# EAGLE board Power_Demo_R2 (EAGLE 5.10)
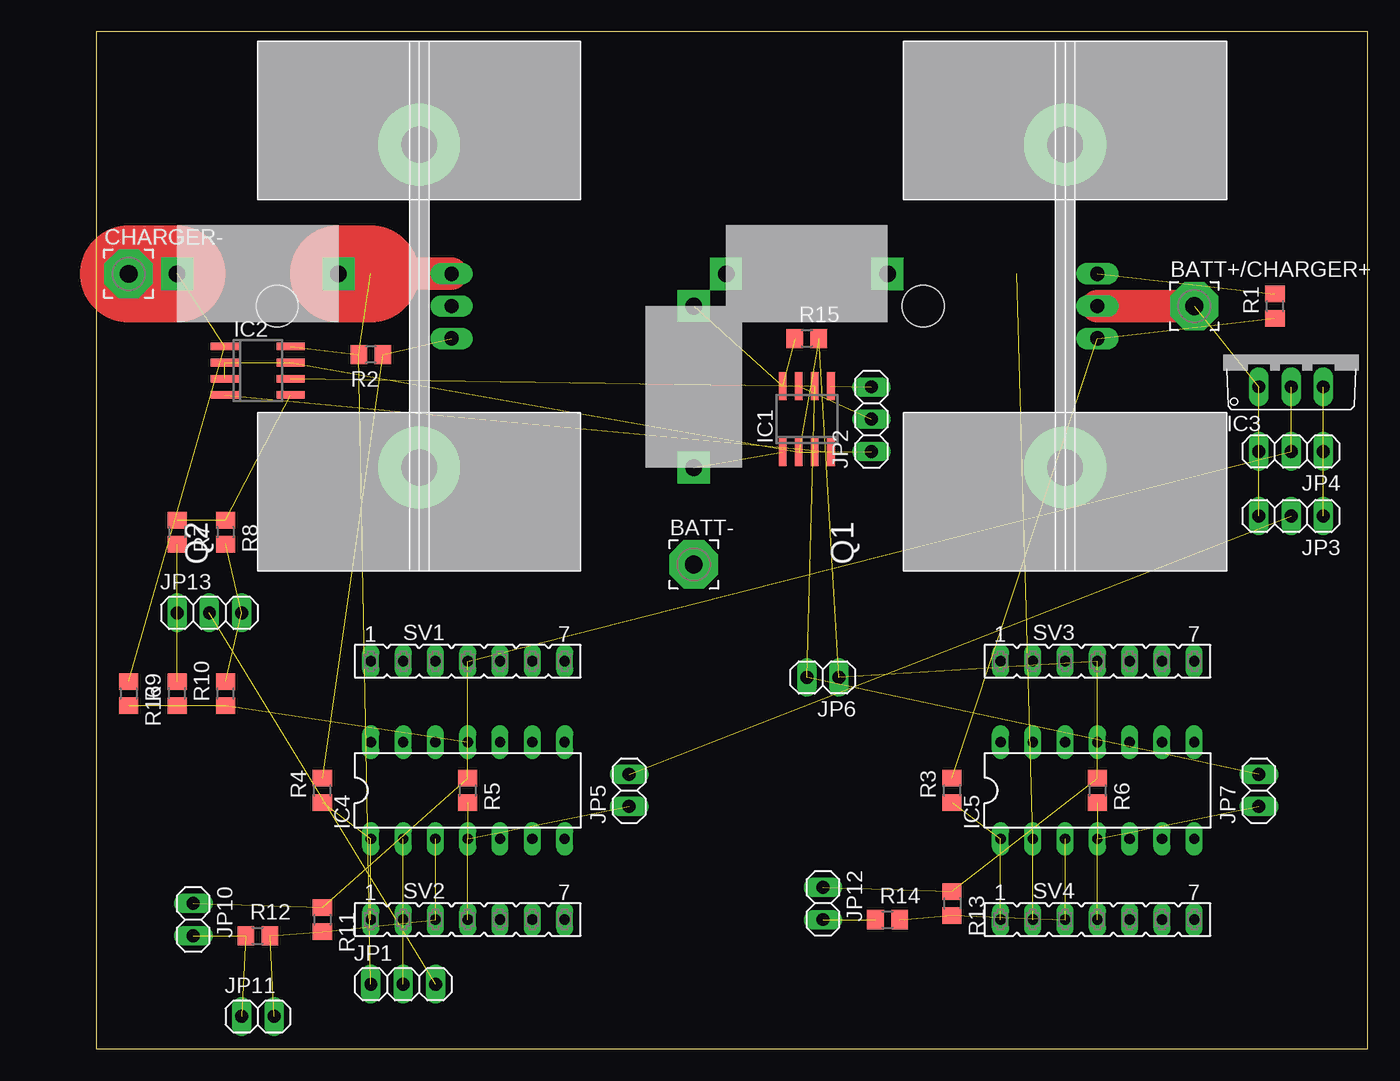
[diagram p0: board, top side]
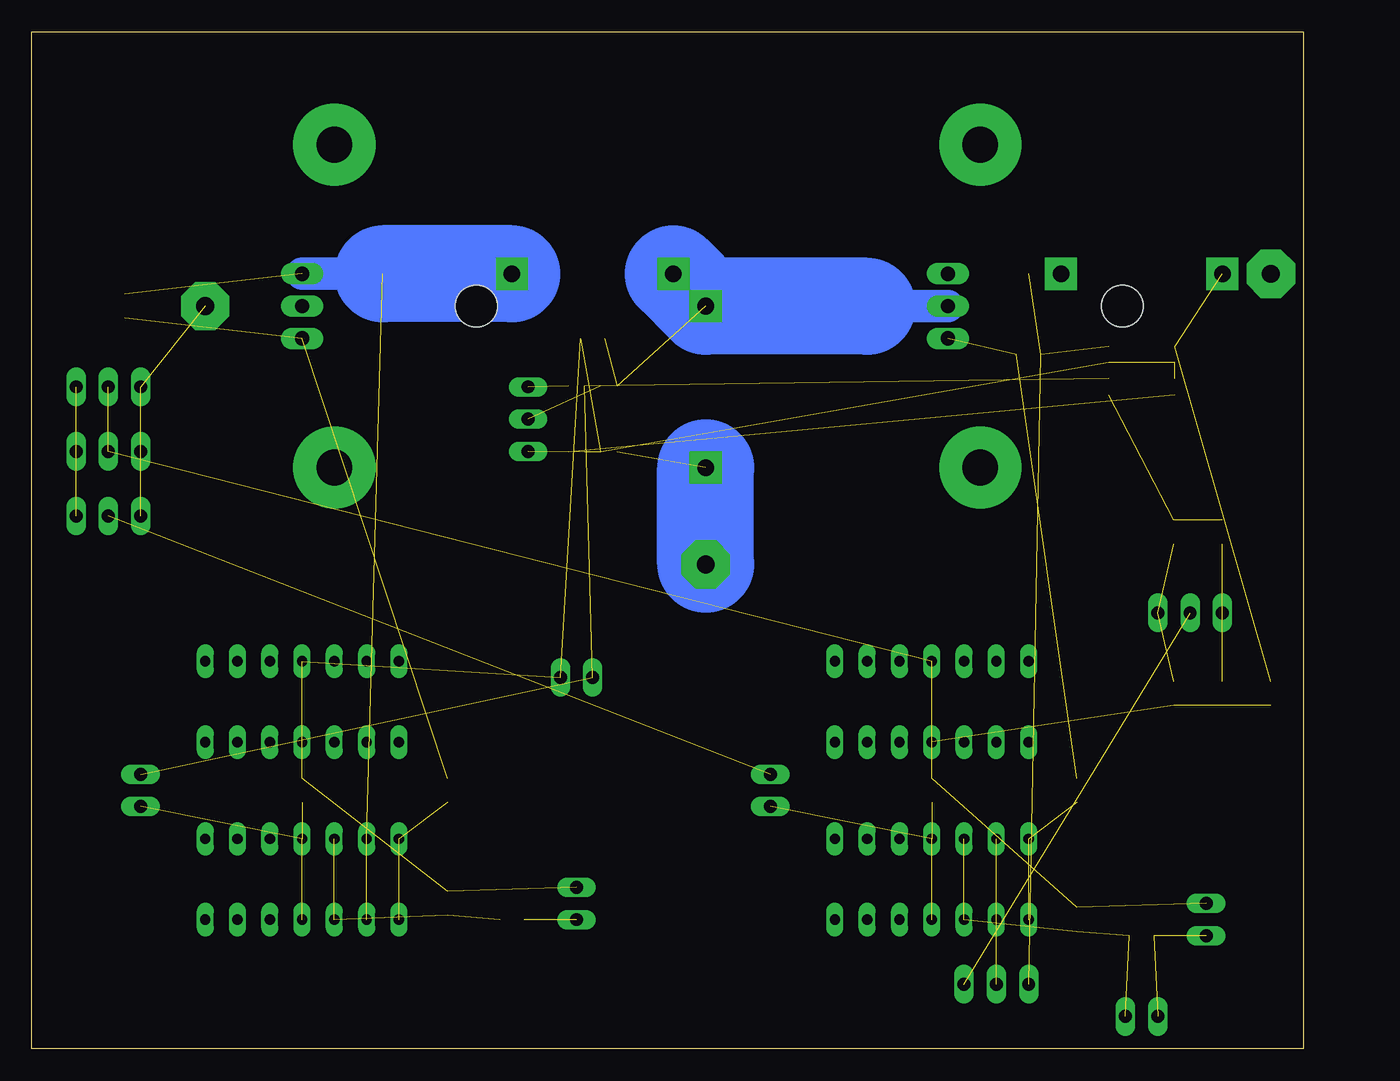
[diagram p1: board, bottom side, seen from below]

Size 100 x 80 mm. Coordinates in mm from the lower left corner, seen from the top.
Outline: 0,0 100,0 100,80 0,80 0,0
Copper layers (1*16): Top 0.035mm / dielectric 1.5mm / Bottom 0.035mm
Design rules "default": minimum track width 10mil, minimum drill 24mil, track to track 8mil, track to pad 8mil, pad to pad 8mil, via to via 8mil, smd to smd 8mil, copper to edge 40mil, drill to drill 8mil, minimum pad ring 10mil, minimum via ring 8mil, stop-mask expansion 4mil, vias tented up to drill 0mil, thermal gap 10mil

## Footprints (pad centres in the part's own frame; a part is rotated, then mirrored left to right if it is on the bottom)
3,81/1,4 = drill 1.397 pad 3.81 octagon: 1 0,0
SO08 = smd 0.6 x 2.2: 1 -1.905,-2.6; 2 -0.635,-2.6; 3 0.635,-2.6; 4 1.905,-2.6; 5 1.905,2.6; 6 0.635,2.6; 7 -0.635,2.6; 8 -1.905,2.6
TO220V = drill 1.016 long: 1 -2.54,-2.54; 2 0,-2.54; 3 2.54,-2.54
DIL14 = drill 0.813 long: 1 -7.62,-3.81; 2 -5.08,-3.81; 3 -2.54,-3.81; 4 0,-3.81; 5 2.54,-3.81; 6 5.08,-3.81; 7 7.62,-3.81; 8 7.62,3.81; 9 5.08,3.81; 10 2.54,3.81; 11 0,3.81; 12 -2.54,3.81; 13 -5.08,3.81; 14 -7.62,3.81
1X03 = drill 1.016 long: 1 -2.54,0; 2 0,0; 3 2.54,0
1X02 = drill 1.016 long: 1 -1.27,0; 2 1.27,0
TO220-W/657-20ABP = drill 1.118 long: 1 -2.54,-2.54; 2 0,-2.54; 3 2.54,-2.54 | drill 2.8 pad 6.452 round: P$1 -12.7,0; P$2 12.7,0 | hole 3.302: 0,11.176
R0805 = smd 1.3 x 1.5: 1 -0.95,0; 2 0.95,0
FE07 = drill 0.813 long: 1 -7.62,0; 2 -5.08,0; 3 -2.54,0; 4 0,0; 5 2.54,0; 6 5.08,0; 7 7.62,0
630HR050E = drill 1.3 pad 2.54 square: P$1 -6.35,0; P$2 6.35,0

## Placement (x,y rotation side)
BATT+/CHARGER+  [3,81/1,4]  86.36,58.42 0 top
BATT-  [3,81/1,4]  46.99,38.1 0 top
CHARGER-  [3,81/1,4]  2.54,60.96 0 top
IC1  AD8210D  [SO08]  55.88,49.53 0 top
IC2  AD8210D  [SO08]  12.7,53.34 270 top
IC3  7805TV  [TO220V]  93.98,54.61 0 top
IC4  MC33079P  [DIL14]  29.21,20.32 0 top
IC5  MC33079P  [DIL14]  78.74,20.32 0 top
JP1  [1X03]  24.13,5.08 0 top
JP2  [1X03]  60.96,49.53 90 top
JP3  [1X03]  93.98,41.91 180 top
JP4  [1X03]  93.98,46.99 180 top
JP5  [1X02]  41.91,20.32 90 top
JP6  [1X02]  57.15,29.21 180 top
JP7  [1X02]  91.44,20.32 90 top
JP10  [1X02]  7.62,10.16 270 top
JP11  [1X02]  12.7,2.54 0 top
JP12  [1X02]  57.15,11.43 270 top
JP13  [1X03]  8.89,34.29 0 top
Q1  RFP12N10L  [TO220-W/657-20ABP]  76.2,58.42 90 top
Q2  RFP12N10L  [TO220-W/657-20ABP]  25.4,58.42 90 top
R1  100k  [R0805]  92.71,58.42 90 top
R2  100k  [R0805]  21.59,54.61 180 top
R3  50  [R0805]  67.31,20.32 90 top
R4  50  [R0805]  17.78,20.32 90 top
R5  1k  [R0805]  29.21,20.32 270 top
R6  1k  [R0805]  78.74,20.32 270 top
R7  255  [R0805]  6.35,40.64 270 top
R8  21.5  [R0805]  10.16,40.64 270 top
R9  1020  [R0805]  6.35,27.94 90 top
R10  1.13k  [R0805]  10.16,27.94 90 top
R11  1k  [R0805]  17.78,10.16 270 top
R12  15k  [R0805]  12.7,8.89 0 top
R13  1k  [R0805]  67.31,11.43 270 top
R14  15k  [R0805]  62.23,10.16 0 top
R15  0  [R0805]  55.88,55.88 0 top
R16  0  [R0805]  2.54,27.94 270 top
SV1  [FE07]  29.21,30.48 0 top
SV2  [FE07]  29.21,10.16 0 top
SV3  [FE07]  78.74,30.48 0 top
SV4  [FE07]  78.74,10.16 0 top
U$1  630HR050E  [630HR050E]  55.88,60.96 0 top
U$2  630HR050E  [630HR050E]  46.99,52.07 90 top
U$3  630HR050E  [630HR050E]  12.7,60.96 0 top

## Library data of the parts
BATT+/CHARGER+ BATT- CHARGER- = wirepad
IC1 IC2 Q1 Q2 U$1-U$3 = NEWPARTS
IC3-IC5 = linear
JP1-JP7 JP10-JP13 = pinhead
R1-R16 = rcl
SV1-SV4 = con-lsta

## Nets
+5V: IC1.6 IC2.6 JP6.2 JP7.2
GND: IC1.2 IC1.3 IC2.2 IC2.3 IC2.7 IC5.11 JP2.1 JP6.1 JP12.1 R6.1 R13.1 R15.2 SV3.4
LOAD: BATT+/CHARGER+.1 IC3.1 JP3.3 JP4.3 Q1.2
N$1: IC1.8 Q2.2 R15.1 U$1.P$1 U$2.P$2
N$2: IC3.3 JP3.1 JP4.1
N$3: IC2.8 JP1.1 Q2.3 R2.2 U$3.P$2
N$4: IC1.5 JP2.3
N$5: BATT-.1 IC1.1 U$2.P$1
N$6: Q2.1 R2.1 R4.2
N$8: Q1.1 R1.1 R3.2
N$9: IC1.7 JP2.2
N$10: JP1.3 JP13.2
N$11: CHARGER-.1 IC2.1 R16.1 U$3.P$1
N$12: IC4.4 JP5.1 R5.2 SV2.4
N$13: IC4.1 R4.1 SV2.1
N$14: IC4.2 JP1.2 SV2.2
N$15: JP13.1 R7.2 R9.2
N$17: JP10.2 JP11.1 R12.1
N$18: JP3.2 JP5.2
N$19: IC4.3 JP11.2 R11.2 R12.2 SV2.3
N$20: IC5.1 R3.1 SV4.1
N$21: IC5.2 Q1.3 R1.2 SV4.2 U$1.P$2
N$22: IC2.5 R7.1 R8.1
N$23: JP13.3 R8.2 R10.2
N$24: IC5.4 JP7.1 R6.2 SV4.4
N$27: JP12.2 R14.1
N$28: IC5.3 R13.2 R14.2 SV4.3
N$29: IC3.2 IC4.11 JP4.2 JP10.1 R5.1 R9.1 R10.1 R11.1 R16.2 SV1.4
NC: IC1.4 IC2.4

## Tracks (layer width: path | path; a pad name or v marks a point on that pad's centre or on a via)
+5V  (3 unrouted)
GND  (12 unrouted)
LOAD  (3 unrouted)
  Top 2.54: Q1.2 BATT+/CHARGER+.1
N$1  (2 unrouted)
  Bottom 2.54: Q2.2 34.29,58.42
  Bottom 7.62: U$1.P$1 U$2.P$2 34.29,58.42
N$2  (2 unrouted)
N$3  (3 unrouted)
  Top 2.54: 21.59,60.96 Q2.3
  Top 7.62: U$3.P$2 21.59,60.96
N$4  (1 unrouted)
N$5  (1 unrouted)
  Bottom 7.62: BATT-.1 U$2.P$1
N$6  (2 unrouted)
N$8  (2 unrouted)
N$9  (1 unrouted)
N$10  (1 unrouted)
N$11  (2 unrouted)
  Top 7.62: CHARGER-.1 U$3.P$1
N$12  (3 unrouted)
N$13  (2 unrouted)
N$14  (2 unrouted)
N$15  (2 unrouted)
N$17  (2 unrouted)
N$18  (1 unrouted)
N$19  (4 unrouted)
N$20  (2 unrouted)
N$21  (3 unrouted)
  Bottom 2.54: 72.39,60.96 Q1.3
  Bottom 7.62: U$1.P$2 72.39,60.96
N$22  (2 unrouted)
N$23  (2 unrouted)
N$24  (3 unrouted)
N$27  (1 unrouted)
N$28  (3 unrouted)
N$29  (9 unrouted)
NC  (1 unrouted)